# Allegro board AI_NAS_FPC_A0.brd

Outline 67.54 x 26 mm; copper layers: TOP, GND02, BOTTOM. Coordinates in mm from the lower left corner of the outline.
Outline path: circle c4,22.4 r1.1 ; circle c4,3.6 r1.1 ; circle c63.54,21.9 r1.1 ; circle c63.54,4.1 r1.1 ; 0,25.4 arc(0.18,25.82) 0.6,26 7.4,26 arc(7.82,25.82) 8,25.4 8,22.35 arc(8.18,21.93) 8.6,21.75 58.94,21.75 arc(59.36,21.93) 59.54,22.35 59.54,23.9 arc(59.71,24.32) 60.14,24.5 66.94,24.5 arc(67.36,24.32) 67.54,23.9 67.54,2.1 arc(67.36,1.68) 66.94,1.5 60.14,1.5 arc(59.71,1.68) 59.54,2.1 59.54,3.65 arc(59.36,4.07) 58.94,4.25 8.6,4.25 arc(8.18,4.07) 8,3.65 8,0.6 arc(7.82,0.18) 7.4,0 0.6,0 arc(0.18,0.18) 0,0.6 0,25.4

## Design rules (mm)
constraint set DEFAULT: min track width 0.089
net group 1: nets DPE_CLKN3 DPE_CLKP3
net group 2: nets DPE_TXN8 DPE_TXP8
net group 3: nets DPE_RXN2 DPE_RXP2
net group DPE_CLK1: nets DPE_CLKN1 DPE_CLKP1
net group DPE_CLK2: nets DPE_CLKN2 DPE_CLKP2
net group DPE_RX3: nets DPE_RXN3 DPE_RXP3
net group DPE_RX8: nets DPE_RXN8 DPE_RXP8
net group DPE_RX9: nets DPE_RXN9 DPE_RXP9
net group DPE_TX2: nets DPE_TXN2 DPE_TXP2
net group DPE_TX3: nets DPE_TXN3 DPE_TXP3
net group DPE_TX9: nets DPE_TXN9 DPE_TXP9

## Placement (name value [footprint] x y rotation side)
J29  OK-118RM050/2-35  [CON50-0P35-OK-118RM]  63.43 13.04 270 bottom
J30  OK-118RM050/2-35  [CON50-0P35-OK-118RM]  4.11 13.04 270 top
NOREF  -  []  66.94 1.5 90 top
NOREF#2  -  []  59.54 23.9 0 top
NOREF#3  -  []  -102.32 -93.99 0 top
NOREF#4  -  []  60.27 25.03 0 top
NOREF#5  -  []  6.65 26.53 0 top
NOREF#6  -  []  0 25.4 0 top
NOREF#7  -  []  0 0.6 0 top
NOREF#8  -  []  0.6 0 90 top

## Library data of the parts
J29 J30 = CON_OK-118RM050/2-35

## Footprints (pads in the part's own frame, mm; a bottom-side part is the same pattern mirrored in y, then rotated)
CON50-0P35-OK-118RM
  rect 0.178x0.533 smd: 1(-4.16,-0.94) 2(-3.81,-0.94) 3(-3.46,-0.94) 4(-3.11,-0.94) 5(-2.76,-0.94) 6(-2.41,-0.94) 7(-2.06,-0.94) 8(-1.71,-0.94) 9(-1.36,-0.94) 10(-1.01,-0.94) 11(-0.66,-0.94) 12(-0.31,-0.94) 13(0.04,-0.94) 14(0.39,-0.94) 15(0.74,-0.94) 16(1.09,-0.94) 17(1.44,-0.94) 18(1.79,-0.94) 19(2.14,-0.94) 20(2.49,-0.94) 21(2.84,-0.94) 22(3.19,-0.94) 23(3.54,-0.94) 24(3.89,-0.94) 25(4.24,-0.94) 26(4.24,0.72) 27(3.89,0.72) 28(3.54,0.72) 29(3.19,0.72) 30(2.84,0.72) 31(2.49,0.72) 32(2.14,0.72) 33(1.79,0.72) 34(1.44,0.72) 35(1.09,0.72) 36(0.74,0.72) 37(0.39,0.72) 38(0.04,0.72) 39(-0.31,0.72) 40(-0.66,0.72) 41(-1.01,0.72) 42(-1.36,0.72) 43(-1.71,0.72) 44(-2.06,0.72) 45(-2.41,0.72) 46(-2.76,0.72) 47(-3.11,0.72) 48(-3.46,0.72) 49(-3.81,0.72) 50(-4.16,0.72)
  rect 0.305x0.305 smd: P1(-4.59,0.38) P3(-4.59,-0.6) P4(4.67,0.38) P6(4.67,-0.6)
  rect 0.254x0.356 smd: P2(-5.155,-0.11) P5(5.235,-0.11)

## Nets
GND: J29.3 J29.6 J29.9 J29.12 J29.15 J29.18 J29.21 J29.24 J29.29 J29.32 J29.35 J29.42 J29.45 J29.48 J29.P1 J29.P2 J29.P3 J29.P4 J29.P5 J29.P6 J30.3 J30.6 J30.9 J30.16 J30.19 J30.22 J30.27 J30.30 J30.33 J30.36 J30.39 J30.42 J30.45 J30.48 J30.P1 J30.P2 J30.P3 J30.P4 J30.P5 J30.P6
DPE_CLKN1: J29.50 J30.1
DPE_CLKN2: J29.5 J30.46
DPE_CLKN3: J29.10 J30.41
DPE_CLKP1: J29.49 J30.2
DPE_CLKP2: J29.4 J30.47
DPE_CLKP3: J29.11 J30.40
DPE_CLKREQN1: J29.28 J30.23
DPE_CLKREQN2: J29.27 J30.24
DPE_CLKREQN3: J29.26 J30.25
DPE_PERSTN: J29.25 J30.26
DPE_RXN2: J29.47 J30.4
DPE_RXN3: J29.44 J30.7
DPE_RXN8: J29.16 J30.35
DPE_RXN9: J29.22 J30.29
DPE_RXP2: J29.46 J30.5
DPE_RXP3: J29.43 J30.8
DPE_RXP8: J29.17 J30.34
DPE_RXP9: J29.23 J30.28
DPE_TXN2: J29.2 J30.49
DPE_TXN3: J29.8 J30.43
DPE_TXN8: J29.13 J30.38
DPE_TXN9: J29.19 J30.32
DPE_TXP2: J29.1 J30.50
DPE_TXP3: J29.7 J30.44
DPE_TXP8: J29.14 J30.37
DPE_TXP9: J29.20 J30.31
HDD1_PRSNT#: J29.39 J30.12
HDD2_PRSNT#: J29.38 J30.13
HDD3_PRSNT#: J29.37 J30.14
HDD4_PRSNT#: J29.36 J30.15
U2_0_IFDETN#: J29.41 J30.10
U2_1_IFDETN#: J29.40 J30.11
U20_I2C4_SCL: J29.34 J30.17
U20_I2C4_SDA: J29.33 J30.18
U21_I2C10_SCL: J29.31 J30.20
U21_I2C10_SDA: J29.30 J30.21

## Via types
v1: diameter 0.406, hole 0.203, TOP to BOTTOM, 378 vias

## Routing (per net, layer and track width the routed paths; a pad name or vN(x,y) marks a point on that pad's centre or on a via; arc(x,y) is an arc through that point)
GND: length 26.4
  TOP w0.178: v1(5.5,10.21) 5.49,10.2 J30.30 ; v1(5.53,15.45) 5.53,15.45 J30.45 ; v1(2.48,15.45) 2.48,15.45 J30.6 ; v1(5.5,11.26) 5.49,11.25 J30.33 ; J30.48 5.53,16.5 v1(5.53,16.5) ; J30.3 2.48,16.5 v1(2.48,16.5) ; v1(5.5,9.16) 5.49,9.15 J30.27 ; v1(5.5,14.41) 5.49,14.4 J30.42 ; v1(5.5,13.35) 5.49,13.35 5.49,13.35 J30.39 ; J30.22 v1(3.7,9.85) ; v1(2.48,14.4) 2.48,14.4 J30.9 ; v1(5.5,12.31) 5.49,12.3 J30.36 ; J30.19 v1(3.7,10.9) ; J30.16 v1(3.7,11.95)
  TOP w0.254: J30.P5 v1(4,7.35) ; v1(3.12,17.67) 3.32,17.67 3.36,17.63 J30.P3 ; v1(4.94,7.91) 4.94,8.12 4.69,8.37 J30.P4 4.08,8.37 v1(3.95,8.24) 3.83,8.37 J30.P6 3.24,8.37 2.94,8.06 v1(2.94,7.99) ; J30.P1 v1(4.89,17.63) ; J30.P2 v1(4,18.65)
  BOTTOM w0.178: J29.9 65.06,14.4 v1(65.07,14.4) ; v1(62.01,14.4) 62.01,14.4 J29.42 ; J29.48 62.01,16.5 v1(62.01,16.5) ; v1(63.31,10.17) 63.31,10.12 63.04,9.85 J29.29 ; v1(65.07,15.45) 65.06,15.45 J29.6 ; J29.35 63.08,11.95 63.39,12.26 v1(63.39,12.28) ; J29.45 62.01,15.45 v1(62.01,15.45) ; J29.32 63.05,10.9 v1(63.39,11.24) ; v1(65.07,9.12) 65.04,9.15 J29.24 ; J29.15 65.06,12.3 v1(65.07,12.3) ; J29.18 65.06,11.25 v1(65.07,11.25) ; v1(65.07,13.35) 65.06,13.35 J29.12 ; v1(65.07,16.5) 65.06,16.5 J29.3 ; J29.21 65.06,10.2 v1(65.07,10.2)
  BOTTOM w0.254: J29.P4 62.76,8.37 v1(62.55,8.17) ; J29.P1 v1(62.67,17.63) ; J29.P5 v1(63.54,7.35) ; J29.P6 v1(64.41,8.37) ; J29.P3 64.32,17.63 v1(64.53,17.83) ; J29.P2 v1(63.54,18.65)
  vias: v1(0.57,16.5) v1(0.57,15.45) v1(0.57,14.4) v1(0.57,13.35) v1(0.57,12.3) v1(0.57,11.25) v1(0.57,10.2) v1(0.57,9.15) v1(0.58,23.52) v1(0.58,21.61) v1(0.58,19.71) v1(0.58,17.8) v1(0.58,8.28) v1(0.58,6.37) v1(0.58,4.47) v1(0.58,2.56) v1(0.58,0.66) v1(0.72,25.42) v1(1.36,7.4) v1(1.87,10.96) v1(1.87,9.87) v1(2.15,24.63) v1(2.23,20.51) v1(2.23,18.66) v1(2.28,5.78) v1(2.49,0.58) v1(2.62,25.42) v1(4.03,20.1) v1(4.36,5.98) v1(4.39,0.58) v1(4.53,25.42) v1(5.17,18.83) v1(6.3,0.58) v1(6.43,25.42) v1(6.41,6.46) v1(6.49,20.43) v1(6.82,4.81) v1(7.42,23.78) v1(7.48,4.03) v1(7.42,2.13) v1(7.51,21.88) v1(7.94,8.12) v1(8.36,19.59) v1(8.67,16.5) v1(8.67,15.45) v1(8.67,14.4) v1(8.8,6.49) v1(9.07,18.02) v1(9.28,21.17) v1(9.21,4.83) v1(9.51,8.14) v1(10.27,19.59) v1(10.7,6.49) v1(10.98,18.02) v1(11.11,4.83) v1(11.18,21.17) v1(11.21,16.5) v1(11.21,15.45) v1(11.21,14.4) v1(11.42,8.14) v1(12.17,19.59) v1(12.61,6.49) v1(12.88,18.02) v1(13.02,4.83) v1(13.09,21.17) v1(13.32,8.14) v1(13.75,16.5) v1(13.75,15.45) v1(13.75,14.4) v1(14.08,19.59) v1(14.51,6.49) v1(14.79,18.02) v1(14.92,4.83) v1(14.99,21.17) v1(15.23,8.14) v1(15.98,19.59) v1(16.29,16.5) v1(16.29,15.45) v1(16.29,14.4) v1(16.42,6.49) v1(16.69,18.02) v1(16.83,4.83) v1(16.9,21.17) v1(17.13,8.14) v1(17.89,19.59) v1(18.32,6.49) v1(18.6,18.02) v1(18.73,4.83) v1(18.8,21.17) v1(18.83,16.5) v1(18.83,15.45) v1(18.83,14.4) v1(19.04,8.14) v1(19.79,19.59) v1(20.23,6.49) v1(20.5,18.02) v1(20.64,4.83) v1(20.71,21.17) v1(20.94,8.14) v1(21.37,16.5) v1(21.37,15.45) v1(21.37,14.4) v1(21.7,19.59) v1(22.13,6.49) v1(22.41,18.02) v1(22.54,4.83) v1(22.61,21.17) v1(22.85,8.14) v1(23.6,19.59) v1(23.91,16.5) v1(23.91,15.45) v1(23.91,14.4) v1(24.04,6.49) v1(24.31,18.02) v1(24.45,4.83) v1(24.52,21.17) v1(24.75,8.14) v1(25.51,19.59) v1(25.94,6.49) v1(26.22,18.02) v1(26.35,4.83) v1(26.42,21.17) v1(26.45,16.5) v1(26.45,15.45) v1(26.45,14.4) v1(26.66,8.14) v1(27.41,19.59) v1(27.85,6.49) v1(28.12,18.02) v1(28.26,4.83) v1(28.33,21.17) v1(28.56,8.14) v1(28.99,16.5) v1(28.99,15.45) v1(28.99,14.4) v1(29.32,19.59) v1(29.75,6.49) v1(30.03,18.02) v1(30.16,4.83) v1(30.23,21.17) v1(30.47,8.14) v1(31.22,19.59) v1(31.53,16.5) v1(31.53,15.45) v1(31.53,14.4) v1(31.66,6.49) v1(31.93,18.02) v1(32.07,4.83) v1(32.14,21.17) v1(32.37,8.14) v1(33.13,19.59) v1(33.56,6.49) v1(33.84,18.02) v1(33.97,4.83) v1(34.04,21.17) v1(34.07,16.5) v1(34.07,15.45) v1(34.07,14.4) v1(34.28,8.14) v1(35.03,19.59) v1(35.47,6.49) v1(35.74,18.02) v1(35.88,4.83) v1(35.95,21.17) v1(36.18,8.14) v1(36.61,16.5) v1(36.61,15.45) v1(36.61,14.4) v1(36.94,19.59) v1(37.37,6.49) v1(37.65,18.02) v1(37.78,4.83) v1(37.85,21.17) v1(38.09,8.14) v1(38.84,19.59) v1(39.15,16.5) v1(39.15,15.45) v1(39.15,14.4) v1(39.28,6.49) v1(39.55,18.02) v1(39.76,21.17) v1(39.69,4.83) v1(39.99,8.14) v1(40.75,19.59) v1(41.18,6.49) v1(41.46,18.02) v1(41.66,21.17) v1(41.59,4.83) v1(41.69,16.5) v1(41.69,15.45) v1(41.69,14.4) v1(41.9,8.14) v1(42.65,19.59) v1(43.09,6.49) v1(43.36,18.02) v1(43.57,21.17) v1(43.5,4.83) v1(43.8,8.14) v1(44.23,16.5) v1(44.23,15.45) v1(44.23,14.4) v1(44.56,19.59) v1(44.99,6.49) v1(45.27,18.02) v1(45.47,21.17) v1(45.4,4.83) v1(45.71,8.14) v1(46.46,19.59) v1(46.77,16.5) v1(46.77,15.45) v1(46.77,14.4) v1(46.9,6.49) v1(47.17,18.02) v1(47.38,21.17) v1(47.31,4.83) v1(47.61,8.14) v1(48.37,19.59) v1(48.8,6.49) v1(49.08,18.02) v1(49.21,4.83) v1(49.28,21.17) v1(49.31,16.5) v1(49.31,15.45) v1(49.31,14.4) v1(49.52,8.14) v1(50.27,19.59) v1(50.71,6.49) v1(50.98,18.02) v1(51.12,4.83) v1(51.19,21.17) v1(51.42,8.14) v1(51.85,16.5) v1(51.85,15.45) v1(51.85,14.4) v1(52.18,19.59) v1(52.61,6.49) v1(52.89,18.02) v1(53.02,4.83) v1(53.09,21.17) v1(53.33,8.14) v1(54.08,19.59) v1(54.39,16.5) v1(54.39,15.45) v1(54.39,14.4) v1(54.52,6.49) v1(54.79,18.02) v1(54.93,4.83) v1(55,21.17) v1(55.23,8.14) v1(55.99,19.59) v1(56.42,6.49) v1(56.7,18.02) v1(56.83,4.83) v1(56.9,21.17) v1(56.93,16.5) v1(56.93,15.45) v1(56.93,14.4) v1(57.14,8.14) v1(57.89,19.59) v1(58.33,6.49) v1(58.6,18.02) v1(58.74,4.83) v1(58.81,21.17) v1(59.04,8.14) v1(59.47,16.5) v1(59.47,15.45) v1(59.47,14.4) v1(59.93,19.57) v1(60.12,22.54) v1(60.12,3.53) v1(60.64,17.99) v1(60.7,6.41) v1(60.84,21.14) v1(61.08,7.73) v1(61.05,4.71) v1(61.37,2.08) v1(61.44,23.92) v1(61.97,19.77) v1(63.27,2.08) v1(63.35,23.92) v1(65.07,17.55) v1(65.25,23.92) v1(65.27,19.44) v1(65.19,6.41) v1(65.93,22.24) v1(65.96,3.31) v1(66.95,23.05) v1(66.95,21.15) v1(66.95,19.24) v1(66.97,17.55) v1(66.97,16.5) v1(66.97,15.45) v1(66.97,14.4) v1(66.97,13.35) v1(66.97,12.3) v1(66.97,11.25) v1(66.97,10.2) v1(66.95,7.81) v1(66.95,5.91) v1(66.95,4) v1(66.95,2.1)
DPE_CLKN1: length 64.3
  TOP w0.081: v1(1.21,16.5) 1.38,16.68 1.38,16.91 1.64,17.17 2.61,17.17 2.64,17.2 J30.1
  BOTTOM w0.076: J29.50 62.16,17.2 62.15,17.19 1.63,17.19 1.36,16.91 1.36,16.65 v1(1.21,16.5)
DPE_CLKN2: length 64.3
  TOP w0.076: J30.46 5.38,15.8 5.39,15.81 65.89,15.81 66.18,16.1 66.18,16.35 v1(66.34,16.5)
  BOTTOM w0.081: J29.5 64.9,15.8 64.94,15.83 65.9,15.83 66.16,16.09 66.16,16.32 v1(66.34,16.5)
DPE_CLKN3: length 63.3
  TOP w0.076: J30.41 5.38,14.05 5.39,14.04 65.76,14.04 65.85,14.14 65.85,14.25 v1(65.7,14.4)
  BOTTOM w0.081: v1(65.7,14.4) 65.88,14.22 65.88,14.11 65.79,14.02 64.94,14.02 64.9,14.05 J29.10
DPE_CLKP1: length 63.3
  TOP w0.081: v1(1.84,16.5) 1.66,16.68 1.66,16.79 1.76,16.88 2.61,16.88 2.64,16.85 J30.2
  BOTTOM w0.076: J29.49 62.16,16.85 62.15,16.86 1.77,16.86 1.69,16.78 1.69,16.65 v1(1.84,16.5)
DPE_CLKP2: length 63.3
  TOP w0.076: v1(65.7,16.5) 65.85,16.35 65.85,16.24 65.76,16.14 5.39,16.14 5.38,16.15 J30.47
  BOTTOM w0.081: J29.4 64.9,16.15 64.94,16.12 65.79,16.12 65.88,16.21 65.88,16.32 v1(65.7,16.5)
DPE_CLKP3: length 64.3
  TOP w0.076: v1(66.34,14.4) 66.18,14.25 66.18,14 65.89,13.71 5.39,13.71 5.38,13.7 J30.40
  BOTTOM w0.081: v1(66.34,14.4) 66.16,14.22 66.16,13.99 65.9,13.73 64.94,13.73 64.9,13.7 J29.11
DPE_CLKREQN1: length 64.6
  TOP w0.089: v1(1.21,8.8) 1.86,9.46 2.61,9.46 2.65,9.5 J30.23
  BOTTOM w0.089: v1(1.21,8.8) 1.89,9.49 4.34,9.49 5.02,8.8 6.84,8.8 7.5,9.46 62.67,9.46 J29.28
DPE_CLKREQN2: length 63
  TOP w0.089: v1(1.84,8.8) 2.22,9.18 2.74,9.18 2.76,9.15 J30.24
  BOTTOM w0.089: v1(1.84,8.8) 2.19,9.16 3.9,9.16 3.91,9.15 4.29,9.15 4.89,8.55 7.04,8.55 7.64,9.15 J29.27
DPE_CLKREQN3: length 61.4
  TOP w0.089: J30.25 2.48,8.8 v1(2.48,8.8)
  BOTTOM w0.089: v1(2.48,8.8) 2.48,8.8 4.24,8.8 4.74,8.29 7.23,8.29 7.74,8.8 J29.26
DPE_PERSTN: length 62.6
  TOP w0.089: J30.26 64.69,8.8 64.86,8.62 65.2,8.62 v1(65.7,9.12)
  BOTTOM w0.089: J29.25 64.87,8.8 64.91,8.76 65.34,8.76 v1(65.7,9.12)
DPE_RXN2: length 64.3
  TOP w0.081: J30.4 2.64,16.15 2.61,16.12 1.64,16.12 1.38,15.86 1.38,15.63 v1(1.21,15.45)
  BOTTOM w0.081: J29.47 62.18,16.15 62.14,16.12 1.64,16.12 1.38,15.86 1.38,15.63 v1(1.21,15.45)
DPE_RXN3: length 64.3
  TOP w0.081: J30.7 2.64,15.1 2.61,15.07 1.64,15.07 1.38,14.81 1.38,14.58 v1(1.21,14.4)
  BOTTOM w0.081: J29.44 62.18,15.1 62.14,15.07 1.64,15.07 1.38,14.81 1.38,14.58 v1(1.21,14.4)
DPE_RXN8: length 63.4
  TOP w0.081: J30.35 5.37,11.95 5.4,11.92 65.79,11.92 65.88,12.01 65.88,12.12 v1(65.7,12.3)
  BOTTOM w0.081: J29.16 64.9,11.95 64.94,11.92 65.79,11.92 65.88,12.01 65.88,12.12 v1(65.7,12.3)
DPE_RXN9: length 63.4
  TOP w0.081: J30.29 5.37,9.85 5.4,9.82 65.79,9.82 65.88,9.91 65.88,10.02 v1(65.7,10.2)
  BOTTOM w0.081: v1(65.7,10.2) 65.88,10.02 65.88,9.91 65.79,9.82 64.94,9.82 64.9,9.85 J29.22
DPE_RXP2: length 63.4
  TOP w0.081: J30.5 2.64,15.8 2.61,15.83 1.76,15.83 1.66,15.74 1.66,15.63 v1(1.84,15.45)
  BOTTOM w0.081: v1(1.84,15.45) 1.66,15.63 1.66,15.74 1.75,15.83 62.14,15.83 62.18,15.8 J29.46
DPE_RXP3: length 63.4
  TOP w0.081: J30.8 2.64,14.75 2.61,14.78 1.76,14.78 1.66,14.69 1.66,14.58 v1(1.84,14.4)
  BOTTOM w0.081: J29.43 62.18,14.75 62.14,14.78 1.75,14.78 1.66,14.69 1.66,14.58 v1(1.84,14.4)
DPE_RXP8: length 64.3
  TOP w0.081: v1(66.34,12.3) 66.16,12.12 66.16,11.89 65.9,11.63 5.4,11.63 5.37,11.6 J30.34
  BOTTOM w0.081: J29.17 64.9,11.6 64.94,11.63 65.9,11.63 66.16,11.89 66.16,12.12 v1(66.34,12.3)
DPE_RXP9: length 64.3
  TOP w0.081: v1(66.34,10.2) 66.16,10.02 66.16,9.79 65.9,9.53 5.4,9.53 5.37,9.5 J30.28
  BOTTOM w0.081: v1(66.34,10.2) 66.16,10.02 66.16,9.79 65.9,9.53 64.94,9.53 64.9,9.5 J29.23
DPE_TXN2: length 64.3
  TOP w0.081: J30.49 5.37,16.85 5.4,16.88 65.87,16.88 66.14,17.16 66.14,17.36 v1(66.34,17.55)
  BOTTOM w0.081: J29.2 64.9,16.85 64.94,16.88 65.9,16.88 66.16,17.14 66.16,17.37 v1(66.34,17.55)
DPE_TXN3: length 64.3
  TOP w0.081: v1(66.34,15.45) 66.14,15.26 66.14,15.06 65.87,14.78 5.4,14.78 5.37,14.75 J30.43
  BOTTOM w0.081: v1(66.34,15.45) 66.16,15.27 66.16,15.04 65.9,14.78 64.94,14.78 64.9,14.75 J29.8
DPE_TXN8: length 63.4
  TOP w0.081: J30.38 5.37,13 5.4,12.97 65.79,12.97 65.88,13.06 65.88,13.17 v1(65.7,13.35)
  BOTTOM w0.081: v1(65.7,13.35) 65.88,13.17 65.88,13.06 65.79,12.97 64.94,12.97 64.9,13 J29.13
DPE_TXN9: length 63.4
  TOP w0.081: J30.32 5.37,10.9 5.4,10.87 65.79,10.87 65.88,10.96 65.88,11.07 v1(65.7,11.25)
  BOTTOM w0.081: v1(65.7,11.25) 65.88,11.07 65.88,10.96 65.79,10.87 64.94,10.87 64.9,10.9 J29.19
DPE_TXP2: length 63.3
  TOP w0.081: v1(65.7,17.55) 65.86,17.39 65.86,17.27 65.75,17.17 5.4,17.17 5.37,17.2 J30.50
  BOTTOM w0.081: J29.1 64.9,17.2 64.94,17.17 65.79,17.17 65.88,17.26 65.88,17.37 v1(65.7,17.55)
DPE_TXP3: length 63.3
  TOP w0.081: J30.44 5.37,15.1 5.4,15.07 65.75,15.07 65.86,15.17 65.86,15.29 v1(65.7,15.45)
  BOTTOM w0.081: v1(65.7,15.45) 65.88,15.27 65.88,15.16 65.79,15.07 64.94,15.07 64.9,15.1 J29.7
DPE_TXP8: length 64.3
  TOP w0.081: v1(66.34,13.35) 66.16,13.17 66.16,12.94 65.91,12.68 5.4,12.68 5.37,12.65 J30.37
  BOTTOM w0.081: v1(66.34,13.35) 66.16,13.17 66.16,12.94 65.9,12.68 64.94,12.68 64.9,12.65 J29.14
DPE_TXP9: length 64.3
  TOP w0.081: v1(66.34,11.25) 66.16,11.07 66.16,10.84 65.9,10.58 5.4,10.58 5.37,10.55 J30.31
  BOTTOM w0.081: J29.20 64.9,10.55 64.94,10.58 65.9,10.58 66.16,10.84 66.16,11.07 v1(66.34,11.25)
HDD1_PRSNT#: length 61.2
  TOP w0.089: J30.12 2.48,13.35 v1(2.48,13.35)
  BOTTOM w0.089: J29.39 7.08,13.35 6.72,12.99 5.02,12.99 4.66,13.35 2.48,13.35 v1(2.48,13.35)
HDD2_PRSNT#: length 64.3
  TOP w0.089: v1(1.21,12.3) 1.86,12.96 2.61,12.96 2.65,13 J30.13
  BOTTOM w0.089: J29.38 7.31,13 7.02,12.71 4.84,12.71 4.56,13 3.91,13 3.9,13 1.9,13 v1(1.21,12.3)
HDD3_PRSNT#: length 63.1
  TOP w0.089: v1(1.84,12.3) 2.22,12.68 2.74,12.68 2.76,12.65 J30.14
  BOTTOM w0.089: v1(1.84,12.3) 2.19,12.66 4.42,12.66 5.12,11.95 6.71,11.95 7.41,12.65 J29.37
HDD4_PRSNT#: length 61.5
  TOP w0.089: J30.15 2.48,12.3 v1(2.48,12.3)
  BOTTOM w0.089: J29.36 62.68,12.33 7.49,12.33 6.81,11.65 4.87,11.65 4.21,12.3 2.48,12.3 v1(2.48,12.3)
U2_0_IFDETN#: length 64
  TOP w0.089: v1(1.21,13.35) 1.86,14.01 2.61,14.01 2.65,14.05 J30.10
  BOTTOM w0.089: v1(1.21,13.35) 1.86,14.01 62.67,14.01 J29.41
U2_1_IFDETN#: length 62.5
  TOP w0.089: v1(1.84,13.35) 2.22,13.73 2.74,13.73 2.76,13.7 J30.11
  BOTTOM w0.089: v1(1.84,13.35) 2.22,13.73 62.68,13.73 J29.40
U20_I2C4_SCL: length 64.7
  TOP w0.089: v1(1.21,10.9) 1.86,11.56 2.61,11.56 2.65,11.6 J30.17
  BOTTOM w0.089: v1(1.21,10.9) 1.9,11.6 4.41,11.6 5.15,10.86 6.64,10.86 7.35,11.57 62.68,11.57 J29.34
U20_I2C4_SDA: length 61.8
  TOP w0.089: J30.18 2.8,11.25 v1(2.48,10.93)
  BOTTOM w0.089: J29.33 62.67,11.29 7.6,11.29 6.89,10.58 5.05,10.58 4.36,11.27 2.81,11.27 v1(2.48,10.93)
U21_I2C10_SCL: length 64.6
  TOP w0.089: J30.20 2.65,10.55 2.61,10.51 1.86,10.51 v1(1.21,9.85)
  BOTTOM w0.089: J29.31 62.69,10.53 7.39,10.53 6.68,9.82 5,9.82 4.28,10.53 1.88,10.53 v1(1.21,9.85)
U21_I2C10_SDA: length 61.8
  TOP w0.089: J30.21 2.84,10.2 v1(2.51,9.87)
  BOTTOM w0.089: v1(2.51,9.87) 2.89,10.25 4.06,10.25 4.77,9.54 6.85,9.54 7.53,10.22 62.69,10.22 J29.30

## Copper pours and planes (outline as drawn; the poured copper is in the pictures)
GND on TOP: 0.36,25.4 0.43,25.57 0.6,25.64 7.4,25.64 7.57,25.57 7.64,25.4 7.64,22.35 7.92,21.67 8.6,21.39 58.94,21.39 59.61,21.67 59.89,22.35 59.89,23.9 59.97,24.07 60.14,24.14 66.94,24.14 67.11,24.07 67.18,23.9 67.18,2.1 67.11,1.93 66.94,1.86 60.14,1.86 59.97,1.93 59.89,2.1 59.89,3.65 59.61,4.33 58.94,4.61 8.6,4.61 7.92,4.33 7.64,3.65 7.64,0.6 7.57,0.43 7.4,0.36 0.6,0.36 0.43,0.43 0.36,0.6 ; 1 cut-out
GND on BOTTOM: 0.36,25.4 0.43,25.57 0.6,25.64 7.4,25.64 7.57,25.57 7.64,25.4 7.64,22.35 7.92,21.67 8.6,21.39 58.94,21.39 59.61,21.67 59.89,22.35 59.89,23.9 59.97,24.07 60.14,24.14 66.94,24.14 67.11,24.07 67.18,23.9 67.18,2.1 67.11,1.93 66.94,1.86 60.14,1.86 59.97,1.93 59.89,2.1 59.89,3.65 59.61,4.33 58.94,4.61 8.6,4.61 7.92,4.33 7.64,3.65 7.64,0.6 7.57,0.43 7.4,0.36 0.6,0.36 0.43,0.43 0.36,0.6 ; 1 cut-out
GND on GND02: 0.36,25.4 0.43,25.57 0.6,25.64 7.4,25.64 7.57,25.57 7.64,25.4 7.64,22.35 7.92,21.67 8.6,21.39 58.94,21.39 59.61,21.67 59.89,22.35 59.89,23.9 59.97,24.07 60.14,24.14 66.94,24.14 67.11,24.07 67.18,23.9 67.18,2.1 67.11,1.93 66.94,1.86 60.14,1.86 59.97,1.93 59.89,2.1 59.89,3.65 59.61,4.33 58.94,4.61 8.6,4.61 7.92,4.33 7.64,3.65 7.64,0.6 7.57,0.43 7.4,0.36 0.6,0.36 0.43,0.43 0.36,0.6

## Text on the board
Ref Des/Silkscreen Bottom: B
Ref Des/Silkscreen Top: A | CIBPBAINAS0-002
DIMENSION: Finishd Thickness:0.45mm +/- 0.03 | Stiffener On BOTTOM Layer Thickness 0.1mm | Stiffener On TOP Layer Thickness 0.1mm
User.19: Pads in Design: 325 | Last Modified Date and Time: Sep 06 11:22:48 2023 | Filename & Location: D:/User/DXB/C-D-PHY-FPC/PCB/MIPI-CD-PHY-3layer.brd
User.20: FIGURE | FINISHED_SIZE | 8.0 | DRILL CHART: TOP to BOTTOM | ALL UNITS ARE IN MILS | PLATED | QTY | 378
